# EAGLE board PCEMouse_rev_C (EAGLE 9.6.2)
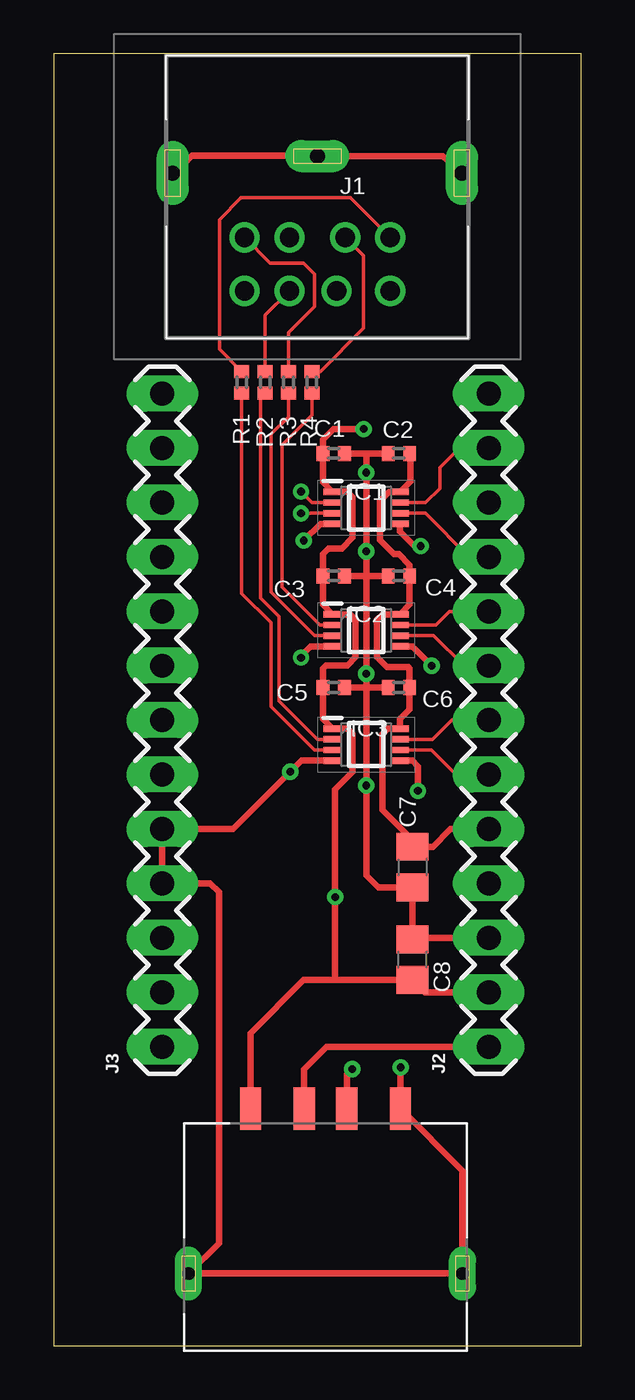
[diagram p0: board, top side]
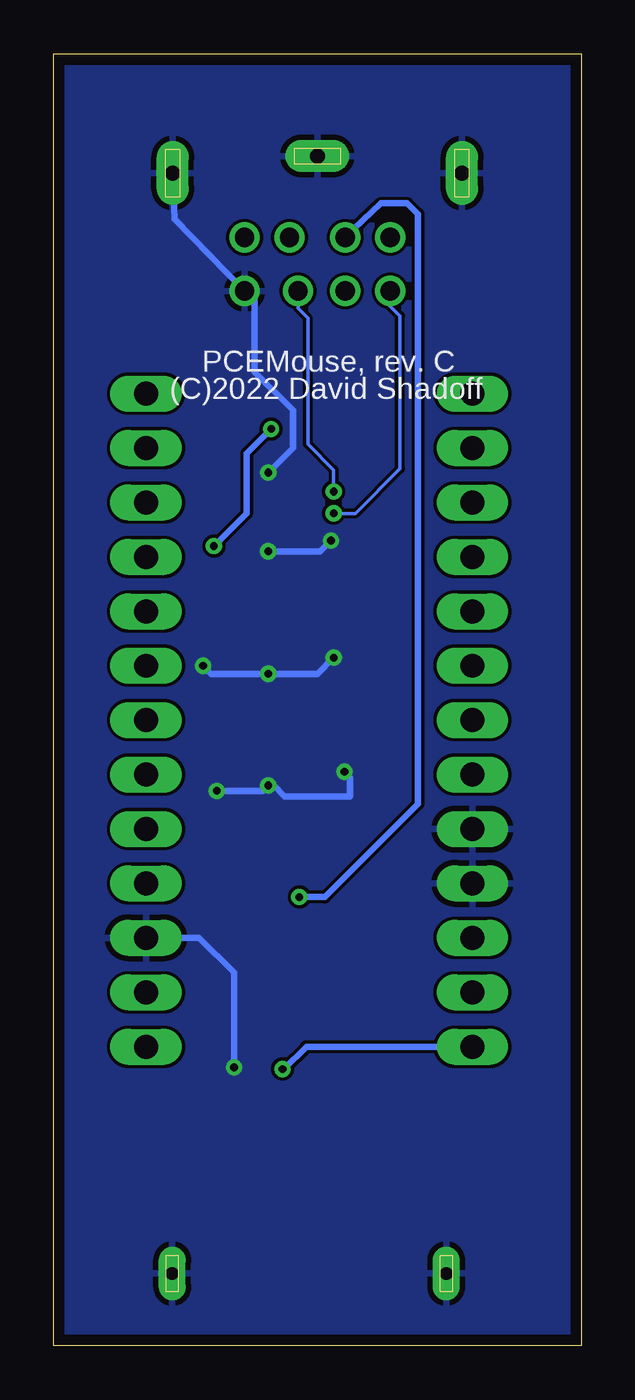
[diagram p1: board, bottom side, seen from below]

Size 24.64 x 60.33 mm. Coordinates in mm from the lower left corner, seen from the top.
Outline: 0,0 24.64,0 24.64,60.33 0,60.33 0,0
Copper layers (1*16): Top 0.035mm / dielectric 1.5mm / Bottom 0.035mm
Design rules "default *": minimum track width 6mil, minimum drill 0.35mm, track to track 6mil, track to pad 6mil, pad to pad 6mil, via to via 6mil, smd to smd 6mil, copper to edge 20mil, drill to drill 6mil, minimum pad ring 10mil, minimum via ring 8mil, stop-mask expansion 3mil, vias tented up to drill 18mil, thermal gap 10mil
Net classes: 0 default: width 0.152 mm, drill 0.356 mm, clearance 0.152 mm; 1 power: width 0.305 mm, drill 0.356 mm, clearance 0.152 mm; 2 signal: width 0.152 mm, drill 0.356 mm, clearance 0.152 mm

## Footprints (pad centres in the part's own frame; a part is rotated, then mirrored left to right if it is on the bottom)
C0402 = smd 0.6 x 0.7: 1 -0.5,0; 2 0.5,0
C0805 = smd 1.3 x 1.5: 1 -0.95,0; 2 0.95,0
SOP50P310X90-8N = smd 0.85 x 0.3: 1 -1.575,0.75; 2 -1.575,0.25; 3 -1.575,-0.25; 4 -1.575,-0.75; 5 1.575,-0.75; 6 1.575,-0.25; 7 1.575,0.25; 8 1.575,0.75
MD80SGK = drill 0.9 pad 1.4: 1 -1.3,-1.9; 2 1.3,-1.9; 3 -3.4,-1.9; 4 -1.3,-4.4; 5 3.4,-1.9; 6 -3.4,-4.4; 7 0.9,-4.4; 8 3.4,-4.4 | drill 0.7 pad 1.5 long: 9 0,1.9; 10 -6.75,1.1; 11 6.75,1.1
1X13-LONGPADS = drill 1.118 long: 1 0,0; 2 2.54,0; 3 5.08,0; 4 7.62,0; 5 10.16,0; 6 12.7,0; 7 15.24,0; 8 17.78,0; 9 20.32,0; 10 22.86,0; 11 25.4,0; 12 27.94,0; 13 30.48,0
R0402 = smd 0.6 x 0.7: 1 -0.5,0; 2 0.5,0
912-121A2026S10100 = smd 1 x 2: D+ 1,6; D- -1,6; GND 3.5,6; VCC -3.5,6 | drill 0.6 pad 1.27 long: P$5 -6.4,-1.7; P$6 6.4,-1.7

## Placement (x,y rotation side)
C1  0.1uF  [C0402]  13.08,41.66 0 top
C2  0.1uF  [C0402]  16.13,41.66 180 top
C3  0.1uF  [C0402]  13.08,35.94 0 top
C4  0.1uF  [C0402]  16.13,35.94 180 top
C5  0.1uF  [C0402]  13.08,30.73 0 top
C6  0.1uF  [C0402]  16.13,30.73 180 top
C7  10uF  [C0805]  16.76,22.35 270 top
C8  10uF  [C0805]  16.76,18.03 90 top
IC1  SN74LVC2T45DCUR  [SOP50P310X90-8N]  14.61,39.12 0 top
IC2  SN74LVC2T45DCUR  [SOP50P310X90-8N]  14.61,33.4 0 top
IC3  SN74LVC2T45DCUR  [SOP50P310X90-8N]  14.61,28.07 0 top
J1  MD-80SGK  [MD80SGK]  12.32,53.64 0 top
J2  [1X13-LONGPADS]  20.32,13.97 90 top
J3  [1X13-LONGPADS]  5.08,13.97 90 top
R1  330  [R0402]  8.79,44.98 90 top
R2  330  [R0402]  9.88,44.98 90 top
R3  330  [R0402]  10.97,44.98 90 top
R4  330  [R0402]  12.06,44.98 90 top
U$1  912-121A2026S10100  [912-121A2026S10100]  12.7,5.08 0 top

## Library data of the parts
C1-C6 R1-R4 = PC-Engine0402
C7 C8 = resistor
IC1-IC3 = PC-Engine; ARROW_PART_NUMBER: SN74LVC2T45DCUR; ARROW_PRICE-STOCK: https://www.arrow.com/en/products/sn74lvc2t45dcur/texas-instruments?region=nac; DESCRIPTION: Texas Instruments SN74LVC2T45DCUR, Voltage Level Translator, Bus Transceiver, 3-State, 1.65 5.5 V, 8-Pin UM; HEIGHT: 0.9mm; MANUFACTURER_NAME: Texas Instruments; MANUFACTURER_PART_NUMBER: SN74LVC2T45DCUR; MOUSER_PART_NUMBER: 595-SN74LVC2T45DCUR; MOUSER_PRICE-STOCK: https://www.mouser.co.uk/ProductDetail/Texas-Instruments/SN74LVC2T45DCUR?qs=0smPjiIwnfIdG9vxyJHBdA%3D%3D
J1 = SamacSys_Parts; DESCRIPTION: Circular DIN Connectors mini-DIN, 8P jack, rt, through hole, full shield; HEIGHT: 13mm; MANUFACTURER_NAME: CUI; MANUFACTURER_PART_NUMBER: MD-80SGK; MOUSER_PART_NUMBER: 490-MD-80SGK; MOUSER_PRICE-STOCK: https://www.mouser.com/Search/Refine.aspx?Keyword=490-MD-80SGK
J2 J3 = SparkFun-Connectors
U$1 = PC-Engine

## Nets
+3V3 [power]: C2.1 C4.1 C6.1 C7.1 IC1.8 IC2.8 IC3.8 J2.5
+5V [power]: C1.1 C3.1 C5.1 C8.1 IC1.1 IC1.5 IC2.1 IC3.1 J1.1 J2.2 U$1.VCC
CLR [signal]: IC1.2 J1.7
D0_OUT: J1.2 R4.2
D1_OUT: J1.3 R3.2
D2_OUT: J1.4 R2.2
D3_OUT: J1.5 R1.2
GND: C1.2 C2.2 C3.2 C4.2 C5.2 C6.2 C7.2 C8.2 IC1.4 IC2.4 IC2.5 IC3.4 IC3.5 J1.8 J1.9 J1.10 J1.11 J2.3 J3.4 J3.5 U$1.GND U$1.P$5 U$1.P$6
GPIO0: J3.2
GPIO1: J3.3
GPIO2: J3.6
GPIO3: J3.7
GPIO4: J3.8
GPIO5: J3.9
GPIO6: J3.10
GPIO7: J3.11
GPIO8: J3.12
GPIO9: J3.13
GPIO10: J2.13
GPIO18: IC1.6 J2.10
GPIO19: IC1.7 J2.12
GPIO20: J2.11
GPIO26: IC2.7 J2.9
GPIO27: IC2.6 J2.8
GPIO28: IC3.7 J2.7
GPIO29: IC3.6 J2.6
N$1: J3.1 U$1.D+
N$8: IC3.3 R1.1
N$9: IC3.2 R2.1
N$10: IC2.3 R3.1
N$11: IC2.2 R4.1
N$12: J2.1 U$1.D-
RESET: J2.4
SEL [signal]: IC1.3 J1.6

## Tracks (layer width: path | path; a pad name or v marks a point on that pad's centre or on a via)
+3V3
  Top 0.305: C2.1 16.66,41.63 16.66,40.34 IC1.8 15.67,39.87 15.24,39.43 15.24,37.61 15.89,36.96 16.13,36.96 16.63,36.46 C4.1 16.63,34.6 IC2.8 15.36,34.15 15.11,33.91 15.11,32.15 15.56,31.69 16.57,31.69 16.63,31.63 C6.1 16.63,29.71 16.18,29.26 IC3.8 15.61,28.82 15.37,28.57 15.37,25.02 16.76,23.62 C7.1 17.71,23.3 18.54,24.13 J2.5
+5V  (via drill 0.36)
  Top 0.305: v14.48,42.8 13.08,42.8 12.58,42.3 C1.1 12.58,40.31 IC1.1 13.04,39.88 13.72,39.88 13.97,39.62 13.97,37.73 13.46,37.23 12.84,37.23 12.58,36.97 C3.1 12.58,34.6 IC2.1 13.86,34.15 14.1,33.91 14.1,32.15 13.72,31.77 12.72,31.77 12.58,31.63 C5.1 12.58,29.27 IC3.1 13.73,28.82 13.97,28.57 13.97,26.8 13.15,25.97 13.15,20.96 | IC1.5 16.18,38.01 16.85,37.34 v17.14,37.34 | 13.15,17.14 13.15,20.96 | J2.2 17.34,16.51 C8.1 13.21,17.08 | 13.21,17.08 13.15,17.14 | 13.15,17.08 11.68,17.08 9.2,14.6 U$1.VCC | 13.21,17.08 13.15,17.08 | 13.15,17.08 13.15,17.14 | v13.16,20.95 13.15,20.96
  Bottom 0.305: v14.48,42.8 15.62,41.66 15.62,38.86 v17.14,37.34 | J1.1 9.35,53.34 8.13,53.34 7.62,52.83 7.62,25.3 11.96,20.95 v13.16,20.95
CLR  (via drill 0.36)
  Top 0.152: IC1.2 12.07,39.37 v11.56,39.88
  Bottom 0.152: v11.56,39.88 11.56,40.89 12.76,42.1 12.76,47.98 13.22,48.43 J1.7
D0_OUT
  Top 0.152: R4.2 12.46,45.48 14.48,47.5 14.48,50.89 J1.2
D1_OUT
  Top 0.152: R3.2 10.97,47.3 12.19,48.51 12.19,50.04 11.68,50.55 10.12,50.55 J1.3
D2_OUT
  Top 0.152: J1.4 9.88,48.11 R2.2
D3_OUT
  Top 0.152: R1.2 7.75,46.52 7.75,52.58 8.74,53.57 8.74,53.59 13.87,53.59 J1.5
GND  (via drill 0.36)
  Top 0.152: C8.2 16.83,19.05
  Top 0.305: J1.11 18.19,55.55 J1.9 12.24,55.55 6.48,55.55 5.67,54.74 J1.10 | 14.61,41.66 v14.61,40.77 v14.61,37.08 14.61,35.94 | 14.61,30.73 v14.61,31.37 14.61,35.94 | v11.56,32.13 11.56,32.22 11.99,32.65 IC2.4 | IC1.4 12.46,38.37 v11.68,37.59 | IC2.5 16.75,32.65 v17.65,31.75 | IC3.4 11.57,27.32 v11.05,26.8 8.38,24.13 J3.5 J3.4 7.32,21.59 7.72,21.18 7.72,4.8 U$1.P$5 U$1.P$6 19.1,8.18 U$1.GND v16.2,13 v16.2,13.01 | IC3.5 16.75,27.32 17.02,27.05 v17.02,25.91 | C1.2 14.61,41.66 | 14.61,41.66 C2.2 | C3.2 14.61,35.94 | 14.61,35.94 C4.2 | 14.61,30.73 C5.2 | C6.2 14.61,30.73 | 14.61,30.73 v14.61,26.16 14.61,21.97 15.17,21.4 C7.2 C8.2 | 16.83,19.05 J2.3
  Bottom 0.305: J1.11 18.99,52.59 J1.8 15.24,49.14 15.24,45.47 13.46,43.69 13.46,41.91 v14.61,40.77 | v11.56,32.13 12.32,31.37 v14.61,31.37 17.27,31.37 v17.65,31.75 | v14.61,37.08 12.19,37.08 v11.68,37.59 | v17.02,25.91 14.86,25.91 v14.61,26.16 14.35,26.16 13.84,25.65 10.79,25.65 10.79,26.54 v11.05,26.8 | J2.3 17.83,19.05 16.2,17.42 v16.2,13.01
  pour Bottom: -0.51,-1.78 -0.51,60.71 25.27,60.71 25.27,-1.78
GPIO18
  Top 0.152: IC1.6 17.37,38.87 19.41,36.83 J2.10
GPIO19
  Top 0.152: IC1.7 17.37,39.37 18.03,40.03 18.03,41 18.95,41.91 J2.12
GPIO26
  Top 0.152: IC2.7 17.85,33.65 18.49,34.29 J2.9
GPIO27
  Top 0.152: IC2.6 17.75,33.15 19.15,31.75 J2.8
GPIO28
  Top 0.152: IC3.7 17.7,28.32 18.59,29.21 J2.7
GPIO29
  Top 0.152: IC3.6 17.65,27.82 18.8,26.67 J2.6
N$1  (via drill 0.36)
  Top 0.305: v13.94,12.93 13.7,12.68 U$1.D+
  Bottom 0.305: J3.1 12.83,13.97 13.87,12.93 v13.94,12.93
N$8
  Top 0.152: R1.1 8.79,35.13 10.16,33.76 10.16,29.84 12.19,27.82 IC3.3
N$9
  Top 0.152: R2.1 9.68,44.28 9.68,34.9 10.54,34.04 10.54,30.1 12.32,28.32 IC3.2
N$10
  Top 0.152: R3.1 10.97,43.37 10.16,42.55 10.16,35.18 12.19,33.15 IC2.3
N$11
  Top 0.152: R4.1 12.06,43.44 10.67,42.05 10.67,35.43 12.45,33.65 IC2.2
N$12
  Top 0.305: U$1.D- 11.7,12.92 12.75,13.97 J2.1
SEL  (via drill 0.36)
  Top 0.152: IC1.3 v11.56,38.87 v11.56,38.86
  Bottom 0.152: v11.56,38.86 10.54,38.86 8.46,40.94 8.46,48.08 8.92,48.53 J1.6

## Text on the board
bNames: PCEMouse, rev. C | (C)2022 David Shadoff
tValues: JLCJLCJLCJLC